# Altium PCB TEMPLATE_PCB_2L.PcbDoc (part 1 of 2)
Units mm, origin at the board's own origin, x right, y up, seen from the top; angles counter-clockwise.
Board outline 123.57 x 47.3 mm, 2 copper layers (Top, Bottom), stack 1.54 mm thick; 72 components, 49 nets, 284 pads, 147 vias.
Unrouted connection lines stored in the file: 24.
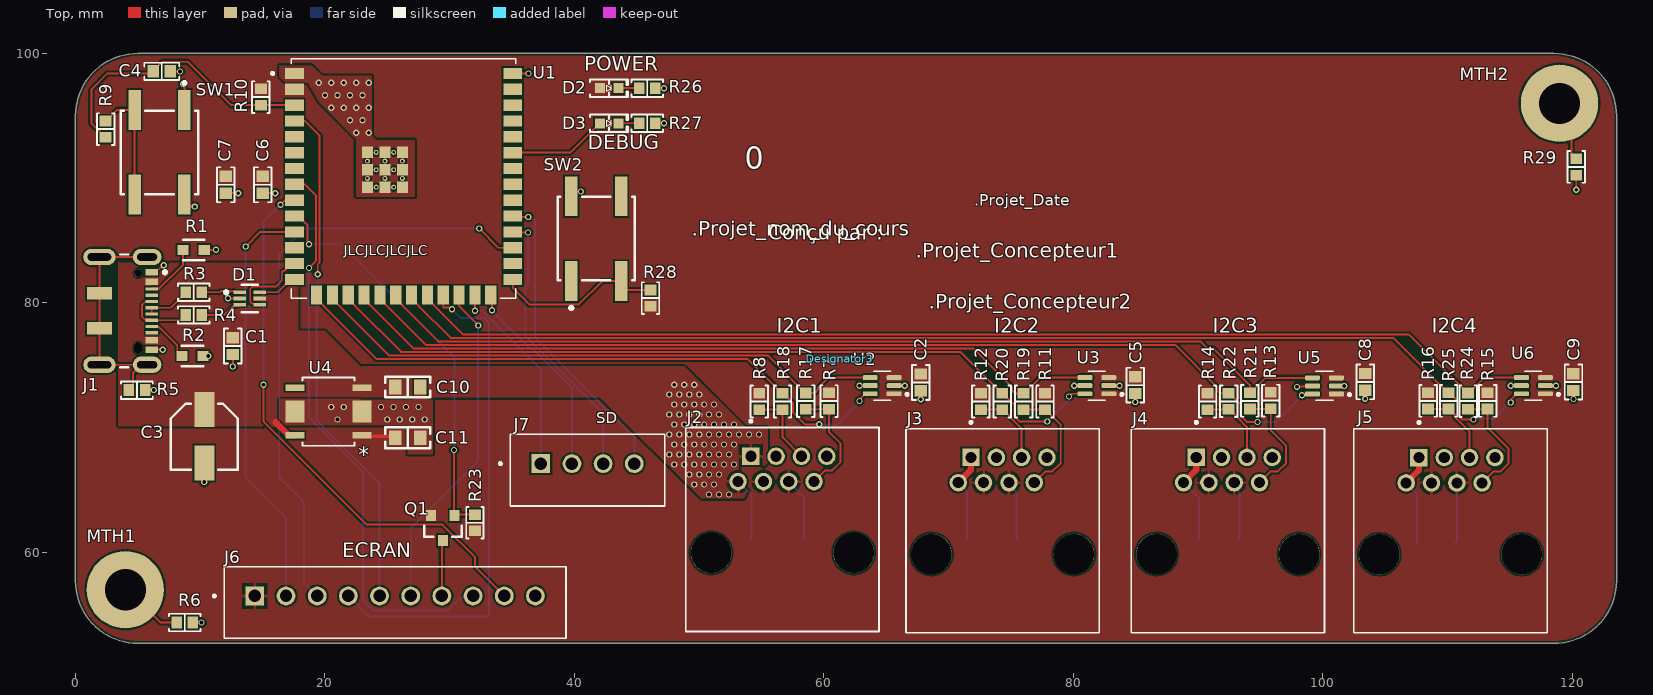
[diagram p0: Top view]
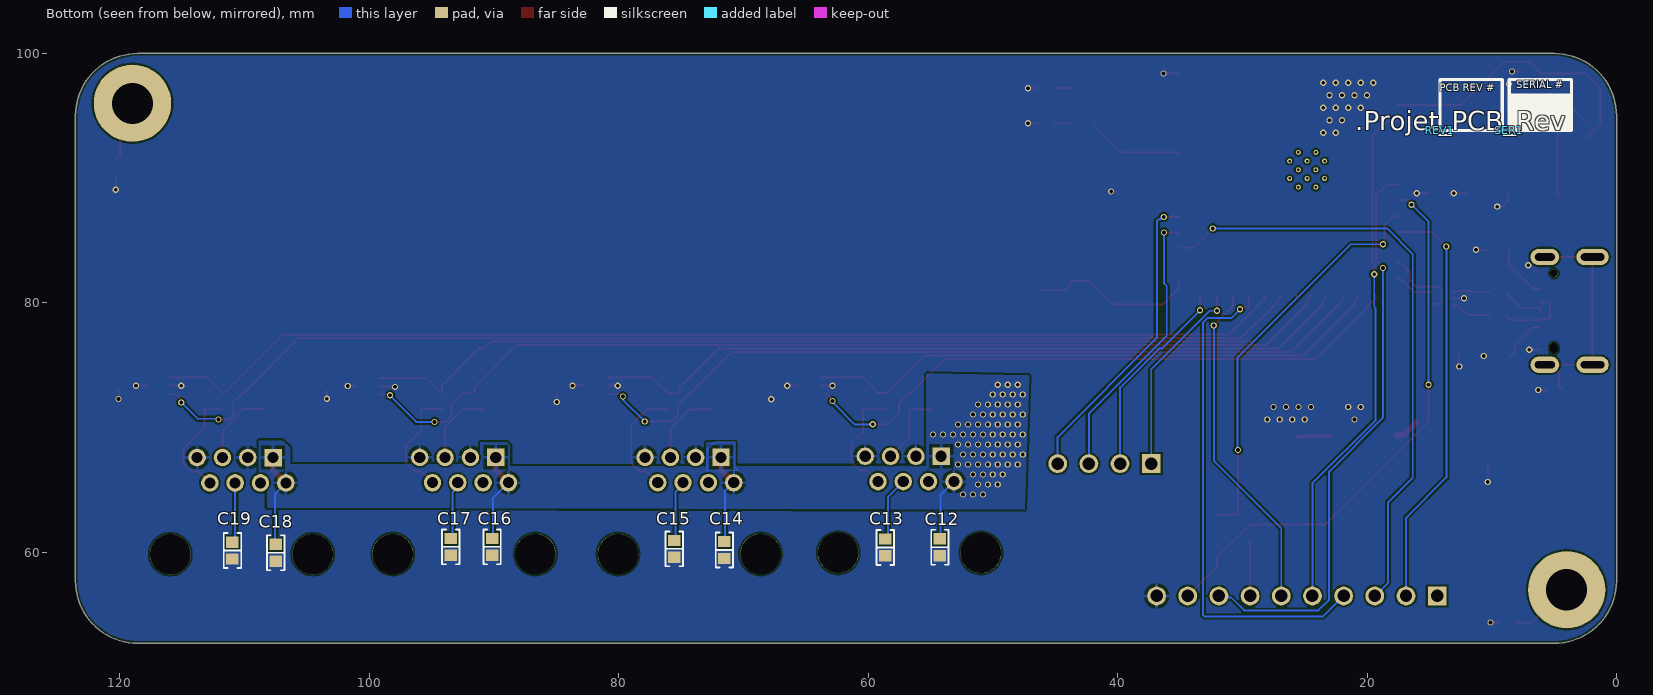
[diagram p1: Bottom view, seen from below]
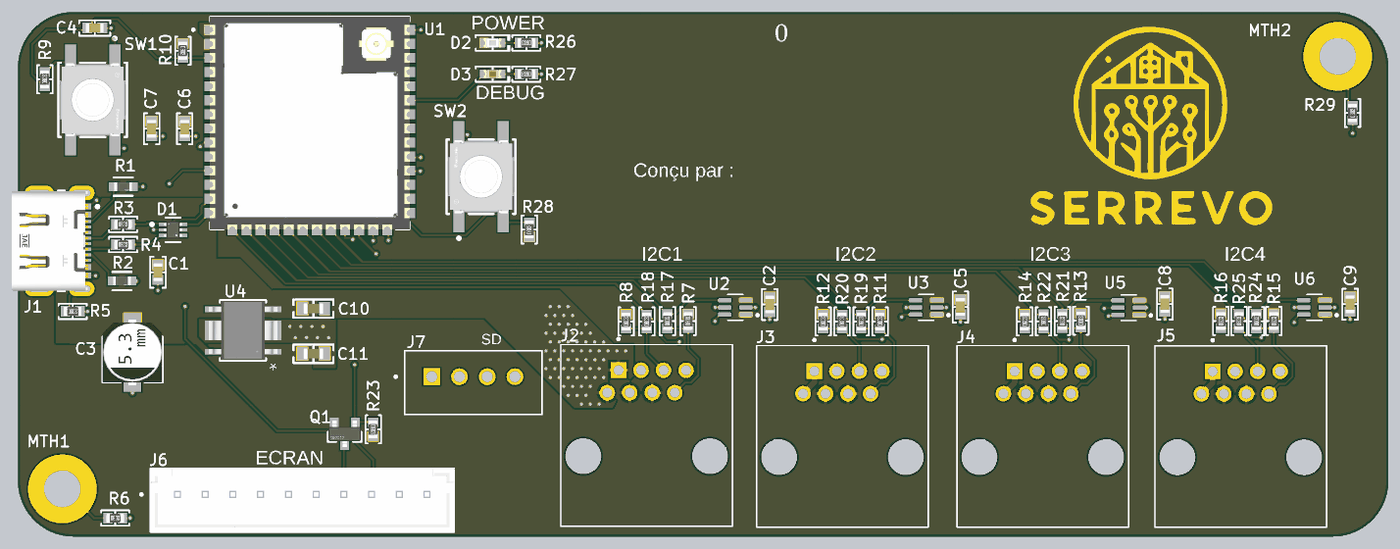
[diagram p2: 3D render of the assembled board from above, using the file's embedded part models]
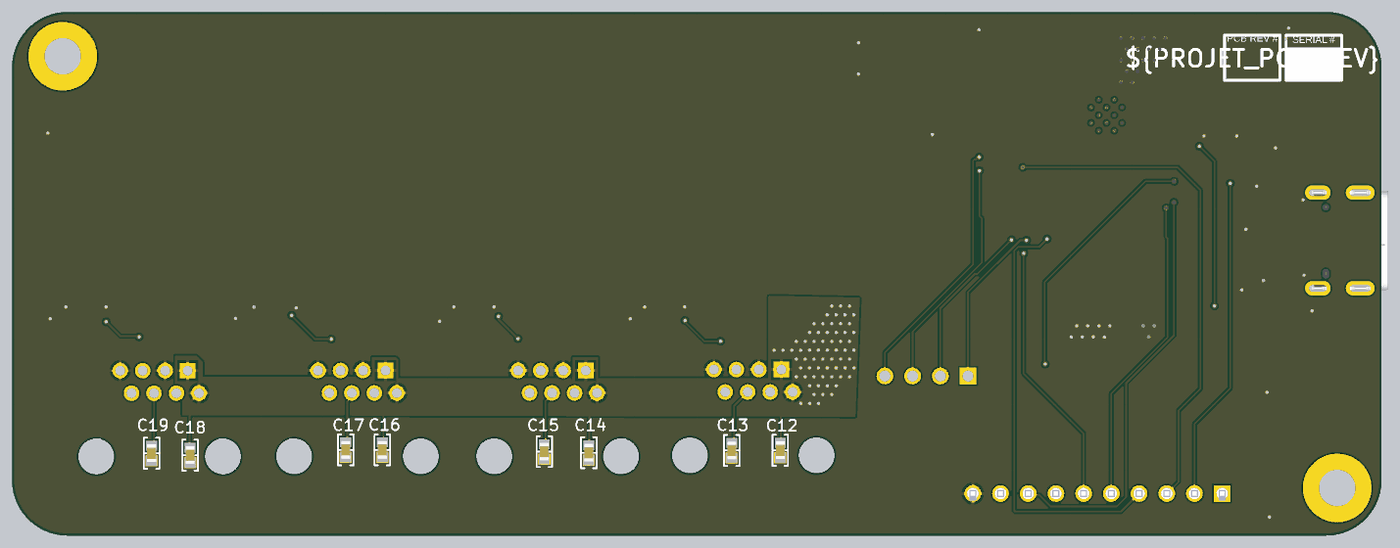
[diagram p3: 3D render of the assembled board from below, using the file's embedded part models]

## Layer stack, top to bottom
Top Solder: solder mask 0.0102, Solder Resist, Dk 3.5
Top: signal copper 0.035
Dielectric 1: core 1.47, FR-4, Dk 4.6
Bottom: signal copper 0.035
Bottom Solder: solder mask 0.0102, Solder Resist, Dk 3.5

## Board outline
0,57.705 0,95 cw(c5,95) 5,100 118.571,100 cw(c118.571,95) 123.571,95 123.571,57.705 cw(c118.571,57.705) 118.571,52.705 5,52.705 cw(c5,57.705)

## Design rules (kind name [scope] priority, off if disabled: settings)
BoardOutlineClearance [All] p1: gap=0.2 ignorepadtopadclearanceinfootprint=FALSE except(0: Arc-SplitContinuation Track-SplitContinuation SMDPad-SplitContinuation THPad-SplitContinuation Via-SplitContinuation Fill-SplitContinuation Poly-SplitContinuation Region-SplitContinuation Text-SplitContinuation)
Clearance [All] p1: gap=0.152 ignorepadtopadclearanceinfootprint=FALSE except(0: Arc-Hole Track-Hole SMDPad-Hole THPad-Hole Via-Hole Fill-Hole Poly-Hole Region-Hole Text-Hole; 0.127: Arc-Arc Arc-Track Track-Track SMDPad-Fill SMDPad-Poly SMDPad-Region; 0.2: Arc-SMDPad Track-SMDPad; 0.254: Arc-Via Track-Via Via-Via; 0.33: Arc-THPad Track-THPad; 0.5: THPad-THPad)
ComponentClearance "Schematic Component Clearance Constraint_1" [InComponent('SER1')] p1: gap=0 collisioncheckmode=3 verticalgap=0 showdistances=FALSE
ComponentClearance "Schematic Component Clearance Constraint" [InComponent('REV1')] p2: gap=0 collisioncheckmode=3 verticalgap=0 showdistances=FALSE
ComponentClearance [All] p3: gap=0.102 collisioncheckmode=3 verticalgap=0.102 showdistances=FALSE
HoleSize [All] p1: absolutevalues=TRUE maxlimit=6.3 minlimit=0.3 maxpercent=80.000 minpercent=20.000
HoleToHoleClearance [All] p1: gap=0.5 allowstackedmicrovias=FALSE
MinimumAnnularRing [All] p1: minimumring=0.1
MinimumSolderMaskSliver [All] p1: minsoldermaskwidth=0.1
PlaneClearance [All] p1: clearance=0.152
PlaneConnect [All] p1: pad.planeconnectstyle=Relief pad.reliefexpansion=0.508 pad.reliefentries=4 pad.reliefconductorwidth=0.254 pad.reliefairgap=0.254 via.planeconnectstyle=Direct via.reliefexpansion=0.508 via.reliefentries=4 via.reliefconductorwidth=0.254 via.reliefairgap=0.254
PolygonConnect [All] p1: thpad.connectstyle=Relief thpad.reliefconductorwidth=0.254 thpad.reliefentries=4 thpad.polygonreliefangle="90 Angle" thpad.airgapwidth=0.254 smdpad.connectstyle=Direct smdpad.reliefconductorwidth=0.254 smdpad.reliefentries=4 smdpad.polygonreliefangle="90 Angle" smdpad.airgapwidth=0.254 via.connectstyle=Direct via.reliefconductorwidth=0.254 via.reliefentries=4 via.polygonreliefangle="90 Angle" via.airgapwidth=0.254
RoutingVias [All] p1: holewidth=0.3 width=0.5 viastyle="Through Hole" minholewidth=0.3 minwidth=0.5 maxholewidth=6.3 maxwidth=6.5
SilkToSilkClearance [All] p1: silktosilkclearance=0.102
SilkToSolderMaskClearance [IsPad] p1: minsilkscreentomaskgap=0.024 clearancetoexposedcopper=FALSE
SolderMaskExpansion SolderMaskExpansion_Via [isVia] p1: expansion=0.102 istentingtop=TRUE
SolderMaskExpansion [All] p2: expansion=0.051 istentingtop=FALSE
Width [All] p1: maxlimit=25.4 minlimit=0.127 preferedwidth=0.152 minimp=50.000000 maximp=50.000000 favimp=50.000000
22 further rules are at their usual default settings.

## Classes and differential pairs
component class TEMPLATE_Connectors: C1 C3 D1 J1 MTH1 MTH2 R1 R2 R3 R4 R5 R6 R29
component class TEMPLATE_Circuit: C2 C4 C5 C6 C7 C9 C10 C11 D2 D3 J2 J3 J4 J5 J6 J7 Q1 R7 R8 R9 R10 R11 R12 R13 R14 R15 R16 R17 R18 R19 R20 R21 R22 R23 R24 R25 R26 SW1 SW2 U1 U2 U3 U4 U5 U6
component class TEMPLATE_Title: REV1 SER1

## Components (designator, comment, footprint, x,y, rotation, side; value= is the part's Value field where it differs from the comment)
C1 "0.1 µF" "CAP 0603_1608" 12.619,76.531 r90 top
C2 "0.012 µF" "CAP 0603_1608" 67.787,73.627 r90 top
C3 "100 µF" "CAP ALSMD 5.3MM H5.4MM" 10.331,69.312 r270 top
C4 "1 µF" "CAP 0603_1608" 6.921,98.558 r0 top
C5 "0.012 µF" "CAP 0603_1608" 84.984,73.4 r90 top
C6 "22µF" "CAP 0603_1608" 15.029,89.474 r90 top
C7 "0.1 µF" "CAP 0603_1608" 12.055,89.474 r90 top
C8 "0.012 µF" "CAP 0603_1608" 103.411,73.67 r90 top
C9 "0.012 µF" "CAP 0603_1608" 120.116,73.649 r90 top
C10 "4.7 µF" "MURATA GRM188 0603_1608" 26.644,69.185 r0 top
C11 "4.7 µF" "MURATA GRM188 0603_1608" 26.644,73.259 r180 top
C12 "47µF" "CAP 0603_1608" 54.254,60.405 r90 bottom
C13 "47µF" "CAP 0603_1608" 58.63,60.395 r90 bottom
C14 "47µF" "CAP 0603_1608" 71.532,60.184 r90 bottom
C15 "47µF" "CAP 0603_1608" 75.552,60.282 r90 bottom
C16 "47µF" "CAP 0603_1608" 90.166,60.44 r90 bottom
C17 "47µF" "CAP 0603_1608" 93.466,60.44 r90 bottom
C18 "47µF" "CAP 0603_1608" 107.508,59.965 r90 bottom
C19 "47µF" "CAP 0603_1608" 110.98,60.139 r90 bottom
D1 "USBLC6-2P6" FP-SOT-666-MFG 13.983,80.355 r0 top
D2 "Green" "LED 0603_1608 GREEN" 42.793,97.215 r0 top
D3 "Red" "LED 0603_1608 RED" 42.793,94.402 r0 top
Designator3 "Comment" STN_STENCIL_TOP_PASTE_181x280 61.271,75.512 r90 top
J1 "Usb-C" FP-DX07S016JA1R1500-MFG 2.921,79.359 r270 top
J2 "SS-60000-007" BEL_SS-60000-007 56.689,65.669 r0 top
J3 "SS-60000-007" BEL_SS-60000-007 74.344,65.583 r0 top
J4 "SS-60000-007" BEL_SS-60000-007 92.408,65.583 r0 top
J5 "SS-60000-007" BEL_SS-60000-007 110.259,65.566 r0 top
J6 "B10B-XH-A(LF)(SN)" JST_B10B-XH-A(LF)(SN) 25.632,55.975 r180 top
J7 "B4B-XH-A" JST_B4B-XH-A 41.063,66.589 r180 top
MTH1 "MTH_M3" MTH_M3#1 4.064,57.15 r0 top
MTH2 "MTH_M3" MTH_M3#2 119.613,96.02 r0 top
Q1 "DMP6350S-7" FP-SOT23-MFG 29.457,61.955 r270 top
R1 "5.1kohms" FP-AC0603-MFG 9.481,84.251 r0 top
R2 "5.1kohms" FP-AC0603-MFG 9.383,75.74 r0 top
R3 "30 Ohms" "RES 0603_1608" 9.481,80.847 r0 top
R4 "30 Ohms" "RES 0603_1608" 9.481,79.032 r0 top
R5 "0 Ohms" "RES 0603_1608" 4.931,73.005 r0 top
R6 "0 Ohms" "RES 0603_1608" 8.766,54.368 r0 top
R7 "330 Ohms" "RES 0603_1608" 60.428,72.128 r90 top
R8 "330 Ohms" "RES 0603_1608" 54.835,72.094 r90 top
R9 "330 Ohms" "RES 0603_1608" 2.421,93.934 r90 top
R10 "10 kOhms" "RES 0603_1608" 14.87,96.504 r270 top
R11 "330 Ohms" "RES 0603_1608" 77.739,72.094 r90 top
R12 "330 Ohms" "RES 0603_1608" 72.601,72.094 r90 top
R13 "330 Ohms" "RES 0603_1608" 95.842,72.168 r90 top
R14 "330 Ohms" "RES 0603_1608" 90.777,72.094 r90 top
R15 "330 Ohms" "RES 0603_1608" 113.237,72.14 r90 top
R16 "330 Ohms" "RES 0603_1608" 108.463,72.14 r90 top
R17 "30 Ohms" "RES 0603_1608" 58.564,72.123 r90 top
R18 "30 Ohms" "RES 0603_1608" 56.7,72.094 r90 top
R19 "30 Ohms" "RES 0603_1608" 76.027,72.094 r90 top
R20 "30 Ohms" "RES 0603_1608" 74.314,72.094 r90 top
R21 "30 Ohms" "RES 0603_1608" 94.17,72.14 r90 top
R22 "30 Ohms" "RES 0603_1608" 92.469,72.107 r90 top
R23 "10 kOhms" "RES 0603_1608" 32.033,62.369 r270 top
R24 "30 Ohms" "RES 0603_1608" 111.672,72.123 r90 top
R25 "30 Ohms" "RES 0603_1608" 110.102,72.14 r90 top
R26 "220 Ohms" "RES 0603_1608" 45.847,97.215 r180 top
R27 "470 Ohms" "RES 0603_1608" 45.847,94.402 r180 top
R28 "10 kOhms" "RES 0603_1608" 46.109,80.384 r90 top
R29 "0 Ohms" "RES 0603_1608" 120.344,90.898 r90 top
REV1 "Revision Cartridge Mini" REV_REVISION_CARTRIDGE_MINI 14.17,93.831 r180 bottom
SER1 "Serial Cartridge MICRO" SER_SERIAL_CARTRIDGE_MICRO 8.609,93.831 r180 bottom
SW1 "EVQ-Q2U01W" FP-EVQ-Q2U01W-MFG 6.738,92.074 r270 top
SW2 "EVQ-Q2U01W" FP-EVQ-Q2U01W-MFG 41.756,85.15 r90 top
U1 "ESP32-S3-WROOM-1U-N16R8" XCVR_ESP32-S3-WROOM-1U-N16R8 26.316,89.984 r0 top
U2 "LTC4311ISC6#TRPBF" SOT65P210X100-6N 64.684,73.363 r180 top
U3 "LTC4311ISC6#TRPBF" SOT65P210X100-6N 81.905,73.363 r180 top
U4 "R1172S331B-E2-FE" HSOP-6_FH006-A-P-SD-2.1_ABL 20.289,71.288 r180 top
U5 "LTC4311ISC6#TRPBF" SOT65P210X100-6N 100.153,73.342 r180 top
U6 "LTC4311ISC6#TRPBF" SOT65P210X100-6N 116.907,73.363 r180 top

## Footprints (in the part's own frame and the unit in brackets; to place one, negate y for a bottom-side part, rotate by r counter-clockwise, add the part's x,y. Pads: shape width x height; smd on the part's side, far side on the other; paste and mask are expansions set on the pad)
BEL_SS-60000-007 [mm]
  rect 1.398x1.398 hole 0.89: 1(-2.535,2.03)
  round 1.398 hole 0.89: 2(-3.555,0) 3(-1.525,0) 4(0.505,0) 5(-0.505,2.03) 6(1.525,2.03) 7(3.555,2.03) 8(2.535,0)
  round 3.25 hole 3.25 unplated: ""(-5.715,-5.72) ""(5.715,-5.72)
  silkscreen extent -7.75,-12.02 7.74,4.94
"CAP 0603_1608" [mm] "Chip Capacitor, 2-Leads, Body 1.60x0.80mm, IPC Medium Density"
  rect 0.9x1 smd: 1(-0.675,0) 2(0.675,0)
  silkscreen extent -1.4,-0.7 1.4,0.7, body extent -0.8,-0.41 0.8,0.41, height 0.82
"CAP ALSMD 5.3MM H5.4MM" [mm] "Aluminum Electrolytic Capacitor, Body 5.30x5.30x5.40mm, IPC Low Density"
  rect 2.8x1.6 smd: 1(-2.15,0) 2(2.15,0)
  silkscreen extent -2.6,-2.7 2.7,2.7, body extent -2.95,-2.7 2.95,2.7, height 5.4
FP-AC0603-MFG [mm]
  rect 0.9x0.8 smd paste+0 mask+0: 1(-0.85,0) 2(0.85,0)
  silkscreen extent -0.85,-0.83 0.85,0.82, body extent -1.4,-0.55 1.4,0.55, height 0.25
FP-DX07S016JA1R1500-MFG [mm]
  rrect100% 1.3x2.3 hole 1.6 slot 0.6 at 0 deg paste-1000 mask+0: 1(-4.32,2.825) 2(4.32,2.825)
  rrect100% 1.3x2.6 hole 1.9 slot 0.6 at 0 deg paste-1000 mask+0: 3(-4.32,-1) 6(4.32,-1)
  rect 1x2 smd paste+0 mask+0: 4(-1.4,-1) 5(1.4,-1)
  rect 0.52x1 smd paste+0 mask+0: A1/B12(-3.1,3.2) A4/B9(-2.35,3.2) A12/B1(3.1,3.2) B4/A9(2.35,3.2)
  rect 0.27x1 smd paste+0 mask+0: A5(-1.75,3.2) A6(-0.25,3.2) A7(0.75,3.2) A8(1.75,3.2) B5(1.25,3.2) B6(0.25,3.2) B7(-0.75,3.2) B8(-1.25,3.2)
  round 0.6 hole 0.6 unplated paste-1000 mask+0: ""(-3,2.1)
  rrect100% 0.85x0.6 hole 0.6 slot 0.85 at 0 deg unplated paste-1000 mask+0: ""(3,2.1)
  silkscreen extent -4.52,0.67 4.52,4.38, body extent -5.07,-3.75 5.07,4.08, height 0.25
FP-EVQ-Q2U01W-MFG [mm]
  rect 3.2x1 smd paste+0 mask+0: A(-3.4,2) A'(3.4,2) B(-3.4,-2) B'(3.4,-2)
  silkscreen extent -5.67,-3.1 3.35,3.1, body extent -5.1,-3.2 5.1,3.2, height 0.25
FP-SOT23-MFG [mm]
  rect 0.9x0.8 smd paste+0 mask+0: 1(-1,0.95) 2(-1,-0.95) 3(1,0)
  silkscreen extent -0.18,-1.5 0.7,1.5, body extent -1.55,-1.6 1.55,1.6, height 0.25
FP-SOT-666-MFG [mm]
  rect 0.99x0.3 smd paste+0 mask+0: 1(-0.805,0.5) 2(-0.805,0) 3(-0.805,-0.5) 4(0.805,-0.5) 5(0.805,0) 6(0.805,0.5)
  silkscreen extent -2.02,-1.1 0.65,1.1, body extent -1.4,-0.95 1.4,0.95, height 0.25
HSOP-6_FH006-A-P-SD-2.1_ABL [mil]
  rect 60x20 smd paste+0 mask+0: 1(-106,75.2) 3(-106,-75.2) 4(106,-75.2) 6(106,75.2)
  rect 60x70 smd paste+0 mask+0: 2(-106,0) 5(106,0)
  silkscreen extent -82,-108 82,108, body extent -122,-103 122,103, height 69
JST_B4B-XH-A [mm]
  rect 1.508x1.508 / inner round 1.508 / far side rect 1.508x1.508 hole 1: 1(3.75,-0.525)
  round 1.508 hole 1: 2(1.25,-0.525) 3(-1.25,-0.525) 4(-3.75,-0.525)
  silkscreen extent -6.2,-2.88 7.1,2.87
JST_B10B-XH-A(LF)(SN) [mm]
  rect 1.508x1.508 / inner round 1.508 / far side rect 1.508x1.508 hole 1: 1(11.25,-0.525)
  round 1.508 hole 1: 2(8.75,-0.525) 3(6.25,-0.525) 4(3.75,-0.525) 5(1.25,-0.525) 6(-1.25,-0.525) 7(-3.75,-0.525) 8(-6.25,-0.525) 9(-8.75,-0.525) 10(-11.25,-0.525)
  silkscreen extent -13.7,-2.87 14.6,2.88, body extent -13.7,-2.88 13.7,2.88, height 7
"LED 0603_1608 GREEN" [mm] "Chip Diode, 2-Leads, Body 1.60x0.80mm, IPC Medium Density"
  rect 0.8x0.8 smd: 1(-0.75,0) 2(0.75,0)
  silkscreen extent -1.52,-0.7 1.52,0.7, body extent -0.8,-0.4 0.8,0.4, height 0.53
"LED 0603_1608 RED" [mm] "Chip Diode, 2-Leads, Body 1.60x0.80mm, IPC Medium Density"
  rect 0.8x0.8 smd: 1(-0.75,0) 2(0.75,0)
  silkscreen extent -1.52,-0.7 1.52,0.7, body extent -0.8,-0.4 0.8,0.4, height 0.53
MTH_M3#1 [mm] "Mounting Hole Metric M3"
  round 6.2 hole 3.3 paste-7.62 mask+0.07: 1(-0.064,-0.15)
MTH_M3#2 [mm] "Mounting Hole Metric M3"
  round 6.2 hole 3.3 paste-7.62 mask+0.07: 1(-0.613,-0.02)
"MURATA GRM188 0603_1608" [mm] "Chip Capacitor, 2-Leads, Body 1.60x0.80mm"
  rect 1x1.2 smd: 1(-1,0) 2(1,0)
  silkscreen extent -1.8,-0.82 1.8,0.82, body extent -0.9,-0.5 0.9,0.5, height 1
"RES 0603_1608" [mm] "Chip Resistor, 2-Leads, Body 1.60x0.80mm, IPC Medium Density"
  rect 0.85x0.95 smd: 1(-0.65,0) 2(0.65,0)
  silkscreen extent -1.27,-0.7 1.27,0.7, body extent -0.8,-0.4 0.8,0.4, height 0.45
REV_REVISION_CARTRIDGE_MINI [mm]
  silkscreen extent 0,0 5,4.08
SER_SERIAL_CARTRIDGE_MICRO [mm]
  silkscreen extent 0,0 5.02,4.08
SOT65P210X100-6N [mm]
  rrect50% 1.19x0.4 smd: 1(-0.96,0.65) 2(-0.96,0) 3(-0.96,-0.65) 4(0.96,-0.65) 5(0.96,0) 6(0.96,0.65)
  silkscreen extent -2.1,-1.16 0.68,1.16
STN_STENCIL_TOP_PASTE_181x280 [mm]
  body extent -90.5,-140 -88.5,-138
XCVR_ESP32-S3-WROOM-1U-N16R8 [mm]
  rect 1.5x0.9 smd: 1(-8.75,8.41) 2(-8.75,7.14) 3(-8.75,5.87) 4(-8.75,4.6) 5(-8.75,3.33) 6(-8.75,2.06) 7(-8.75,0.79) 8(-8.75,-0.48) 9(-8.75,-1.75) 10(-8.75,-3.02) 11(-8.75,-4.29) 12(-8.75,-5.56) 13(-8.75,-6.83) 14(-8.75,-8.1) 27(8.75,-8.1) 28(8.75,-6.83) 29(8.75,-5.56) 30(8.75,-4.29) 31(8.75,-3.02) 32(8.75,-1.75) 33(8.75,-0.48) 34(8.75,0.79) 35(8.75,2.06) 36(8.75,3.33) 37(8.75,4.6) 38(8.75,5.87) 39(8.75,7.14) 40(8.75,8.41)
  rect 0.9x1.5 smd: 15(-6.985,-9.35) 16(-5.715,-9.35) 17(-4.445,-9.35) 18(-3.175,-9.35) 19(-1.905,-9.35) 20(-0.635,-9.35) 21(0.635,-9.35) 22(1.905,-9.35) 23(3.175,-9.35) 24(4.445,-9.35) 25(5.715,-9.35) 26(6.985,-9.35)
  rect 0.9x0.9 smd: 41_1(-2.9,2.09) 41_2(-1.5,2.09) 41_3(-0.1,2.09) 41_4(-2.9,0.69) 41_5(-1.5,0.69) 41_6(-0.1,0.69) 41_7(-2.9,-0.71) 41_8(-1.5,-0.71) 41_9(-0.1,-0.71)
  round 0.4 hole 0.2 mask+0: 41_10(-2.2,2.09) 41_11(-0.8,2.09) 41_12(-2.9,1.39) 41_13(-1.5,1.39) 41_14(-0.1,1.39) 41_15(-2.2,0.69) 41_16(-0.8,0.69) 41_17(-2.9,-0.01) 41_18(-1.5,-0.01) 41_19(-0.1,-0.01) 41_20(-2.2,-0.71) 41_21(-0.8,-0.71)
  silkscreen extent -10.6,-9.6 9,9.6, body extent -9,-9.6 9,9.6, height 3.35

## Part data
C1: library part KGM15AR71C104MM, "CAP CER 0.1UF 16V X7R 0603", Device Package="0603 (1608 Metric)", Manufacturer="KYOCERA AVX", Operating Temperature="-55°C ~ 125°C", Package / Case=0603, Supplier Part Number 1=478-KGM15AR71C104MMCT-ND, Temperature Coefficient=X7R, Tolerance=±20%, Voltage - Rated=16V, Applications="General Purpose", Capacitance="0.1 µF", ComponentLink1Description=Datasheet, ComponentLink1URL=https://datasheets.kyocera-avx.com/X7RDielectric.pdf, ComponentLink2Description="DigiKey Link", ComponentLink2URL=https://www.digikey.com/en/products/detail/kyocera-avx/KGM15AR71C104MM/3661140, lastupdated="2024-02-09 20:09:12", Lifecycle Status=Active, Minimum Order=1, Mounting Type="Surface Mount, MLCC", Packaging=CutTape, Part Number=KGM15AR71C104MM, Part Status=Active, partid=52535, Price=0.01, Series="KGM - X7R", Size / Dimension="0.063\" L x 0.032\" W (1.60mm x 0.81mm)", Supplier 1=DigiKey, Thickness (Max)="0.035\" (0.90mm)"
C2 C5 C8 C9: library part CC0603KRX7R7BB123, "CAP CER 0.012UF 16V X7R 0603", Device Package="0603 (1608 Metric)", Manufacturer=Yageo, Operating Temperature="-55°C ~ 125°C", Supplier Part Number 1=311-3370-1-ND, Temperature Coefficient=X7R, Tolerance=±10%, Voltage - Rated=16V, Applications="General Purpose", Capacitance="0.012 µF", ComponentLink1Description=Datasheet, ComponentLink1URL=https://www.yageo.com/upload/media/product/productsearch/datasheet/mlcc/UPY-GPHC_X7R_6.3V-to-50V_18.pdf, ComponentLink2Description="DigiKey Link", ComponentLink2URL=https://www.digikey.com/en/products/detail/yageo/CC0603KRX7R7BB123/5883754, lastupdated="2024-02-09 20:10:17", Lifecycle Status=Active, Minimum Order=1, Mounting Type="Surface Mount, MLCC", Package / Case="0603 (1608 Metric)", Packaging=TapeAndReel, Part Number=CC0603KRX7R7BB123, Part Status=Active, partid=12340, Price=0.01, Series=CC, Size / Dimension="0.063\" L x 0.031\" W (1.60mm x 0.80mm)", Supplier 1=DigiKey, Thickness (Max)="0.035\" (0.90mm)"
C3: library part EEE-1AA101WR, "CAP ALUM 100UF 20% 10V SMD", Device Package="Radial, Can - SMD", Lifetime @ Temp.="1000 Hrs @ 85°C", Manufacturer="Panasonic Electronic Components", Operating Temperature="-40°C ~ 85°C", Ratings=AEC-Q200, Ripple Current @ High Frequency="85 mA @ 10 kHz", Ripple Current @ Low Frequency="50 mA @ 120 Hz", Supplier Part Number 1=PCE3867CT-ND, Tolerance=±20%, Voltage - Rated="10 V", Applications=Automotive, Capacitance="100 µF", ComponentLink1Description=Datasheet, ComponentLink1URL=//media.digikey.com/pdf/Data%20Sheets/Panasonic%20Electronic%20Components/S_Series,Type_V_Rev2018.pdf, ComponentLink2Description="DigiKey Link", ComponentLink2URL=https://www.digikey.com/en/products/detail/panasonic-electronic-components/EEE-1AA101WR/766034, Height - Seated (Max)="0.213\" (5.40mm)", lastupdated="2024-06-03 19:53:13", Lifecycle Status=Active, Minimum Order=1, Mounting Type="Surface Mount", Package / Case="Radial, Can - SMD", Packaging=TapeAndReel, Part Number=EEE-1AA101WR, Part Status=Active, partid=7834, Polarization=Polar, Price=0.11, Series=S, Size / Dimension="0.197\" Dia (5.00mm)", Supplier 1=DigiKey, Surface Mount Land Size="0.209\" L x 0.209\" W (5.30mm x 5.30mm)"
C4: library part C0603X105M4RACAUTO, "CAP CER 1UF 16V X7R 0603", Device Package="0603 (1608 Metric)", Manufacturer=KEMET, Operating Temperature="-55°C ~ 125°C", Ratings=AEC-Q200, Supplier Part Number 1=399-17719-1-ND, Temperature Coefficient=X7R, Tolerance=±20%, Voltage - Rated=16V, Applications="Automotive, Boardflex Sensitive", Capacitance="1 µF", ComponentLink1Description=Datasheet, ComponentLink1URL=https://api.kemet.com/component-edge/download/datasheet/C0603X105M4RACAUTO.pdf, ComponentLink2Description="DigiKey Link", ComponentLink2URL=https://www.digikey.com/en/products/detail/kemet/C0603X105M4RACAUTO/8635846, Features="Soft Termination", lastupdated="2024-02-09 20:10:28", Lifecycle Status=Active, Minimum Order=1, Mounting Type="Surface Mount, MLCC", Package / Case="0603 (1608 Metric)", Packaging=TapeAndReel, Part Number=C0603X105M4RACAUTO, Part Status=Active, partid=3927, Price=0.06, Series="SMD Auto X7R Flex", Size / Dimension="0.063\" L x 0.031\" W (1.60mm x 0.80mm)", Supplier 1=DigiKey, Thickness (Max)="0.037\" (0.95mm)"
C6: library part 06036D226MAT2A, "CAP CER 22UF 6.3V X5R 0603", Device Package="0603 (1608 Metric)", Manufacturer="AVX Corporation", Operating Temperature="-55°C ~ 85°C", Supplier Part Number 1=478-10812-1-ND, Temperature Coefficient=X5R, Tolerance=±20%, Voltage - Rated=6.3V, Applications="General Purpose", Capacitance=22µF, ComponentLink1Description=Datasheet, ComponentLink1URL=http://datasheets.avx.com/cx5r.pdf, ComponentLink2Description="DigiKey Link", ComponentLink2URL=http://digikey.com/product-detail/en/avx-corporation/06036D226MAT2A/478-10812-1-ND/7536349, lastupdated="2020-09-02 01:03:16", Lifecycle Status=Active, Minimum Order=1, Mounting Type="Surface Mount, MLCC", Package / Case="0603 (1608 Metric)", Packaging=TapeAndReel, Part Number=06036D226MAT2A, Part Status=Active, partid=13180, Price=0.10, Series=-, Size / Dimension="0.063\" L x 0.032\" W (1.60mm x 0.81mm)", Supplier 1=DigiKey, Thickness (Max)="0.040\" (1.02mm)"
C7: library part C0603C104M4RAC7411, "CAP CER 0.1UF 16V X7R 0603", Device Package="0603 (1608 Metric)", Manufacturer=KEMET, Operating Temperature="-55°C ~ 125°C", Supplier Part Number 1=399-5784-2-ND, Temperature Coefficient=X7R, Tolerance=±20%, Voltage - Rated=16V, Applications="Bypass, Decoupling", Capacitance="0.1 µF", ComponentLink1Description=Datasheet, ComponentLink1URL=https://api.kemet.com/component-edge/download/datasheet/C0603C104M4RAC7411.pdf, ComponentLink2Description="DigiKey Link", ComponentLink2URL=https://www.digikey.com/en/products/detail/kemet/C0603C104M4RAC7411/1865802, lastupdated="2024-02-09 20:10:25", Lifecycle Status=Active, Minimum Order=15000, Mounting Type="Surface Mount, MLCC", Package / Case="0603 (1608 Metric)", Packaging=TapeAndReel, Part Number=C0603C104M4RAC7411, Part Status=Active, partid=6660, Price=0.01, Series="SMD Comm X7R", Size / Dimension="0.063\" L x 0.031\" W (1.60mm x 0.80mm)", Supplier 1=DigiKey, Thickness (Max)="0.034\" (0.87mm)"
C10 C11: library part GRM188C81C475KE11D, "CAP CER 4.7UF 16V X6S 0603", Device Package="0603 (1608 Metric)", Manufacturer="Murata Electronics", Operating Temperature="-55°C ~ 105°C", Supplier Part Number 1=490-13362-1-ND, Temperature Coefficient=X6S, Tolerance=±10%, Voltage - Rated=16V, Applications="General Purpose", Capacitance="4.7 µF", ComponentLink1Description=Datasheet, ComponentLink1URL=https://search.murata.co.jp/Ceramy/image/img/A01X/G101/ENG/GRM188C81C475KE11-01.pdf, ComponentLink2Description="DigiKey Link", ComponentLink2URL=https://www.digikey.com/en/products/detail/murata-electronics/GRM188C81C475KE11D/4905320, lastupdated="2024-07-20 00:23:22", Lifecycle Status=Active, Minimum Order=1, Mounting Type="Surface Mount, MLCC", Package / Case="0603 (1608 Metric)", Packaging=TapeAndReel, Part Number=GRM188C81C475KE11D, Part Status=Active, partid=2389, Price=0.03, Series=GRM, Size / Dimension="0.063\" L x 0.031\" W (1.60mm x 0.80mm)", Supplier 1=DigiKey, Thickness (Max)="0.037\" (0.95mm)"
C12 C13 C14 C15 C16 C17 C18 C19: library part 06036D476MAT2A, "CAP CER 47UF 6.3V X5R 0603", Device Package="0603 (1608 Metric)", Manufacturer="AVX Corporation", Operating Temperature="-55°C ~ 85°C", Supplier Part Number 1=478-11180-1-ND, Temperature Coefficient=X5R, Tolerance=±20%, Voltage - Rated=6.3V, Applications="General Purpose", Capacitance=47µF, ComponentLink1Description=Datasheet, ComponentLink1URL=http://datasheets.avx.com/cx5r.pdf, ComponentLink2Description="DigiKey Link", ComponentLink2URL=http://digikey.com/product-detail/en/avx-corporation/06036D476MAT2A/478-11180-1-ND/7563130, lastupdated="2020-09-02 01:03:20", Lifecycle Status=Active, Minimum Order=1, Mounting Type="Surface Mount, MLCC", Package / Case="0603 (1608 Metric)", Packaging=TapeAndReel, Part Number=06036D476MAT2A, Part Status=Active, partid=11014, Price=0.41, Series=-, Size / Dimension="0.063\" L x 0.031\" W (1.60mm x 0.80mm)", Supplier 1=DigiKey
D1: library part CMP-12225-000058-1, "TVS DIODE 5.25V 17V SOT666", Breakdown Voltage=6V, Capacitance=3.5pF, Case/Package=SOT-666, Clamping Voltage=17V, Leakage Current=150nA, Max Operating Temperature=125°C, Min Operating Temperature=-40°C, Operating Supply Voltage=5V, Package Quantity=1, Peak Pulse Current=5A, Power Line Protection=Yes, Test Current=1mA, Contact Plating=Tin, Depth=1.3mm, Direction=Unidirectional, Element Configuration=Dual, ESD Protection=Yes, Height=0.6mm, Lead Free="Lead Free", Length=1.7mm, Max Breakdown Voltage=6V, Max Reverse Leakage Current=150nA, Min Breakdown Voltage=6V, Mount="Surface Mount", Number of Bidirectional Channels=2, Number of Channels=2, Number of Elements=1, Number of Pins=6, Packaging="Tape and Reel", Polarity=Unidirectional, Radiation Hardening=No, REACH SVHC="No SVHC", Reverse Breakdown Voltage=6V, Reverse Standoff Voltage=5V, Termination=SMD/SMT, Width=1.3mm, Working Voltage=5V
D2: library part SML-D12P8WT86, "LED GREEN DIFFUSED 0603 SMD", Current - Test=20mA, Device Package="0603 (1608 Metric)", Lens Color=White, Manufacturer="Rohm Semiconductor", Millicandela Rating=6.3mcd, Supplier Device Package="1608 (0603)", Supplier Part Number 1=511-1579-1-ND, Voltage - Forward (Vf) (Typ)=2.2V, Color=Green, ComponentLink1Description=Datasheet, ComponentLink1URL=https://www.rohm.com/datasheet/SML-D12V8W, ComponentLink2Description="DigiKey Link", ComponentLink2URL=https://www.digikey.com/en/products/detail/rohm-semiconductor/SML-D12P8WT86/1641798, Configuration=Standard, Height (Max)=0.65mm, lastupdated="9/26/2023 8:24:57 PM", Lens Size="1.20mm x 0.80mm", Lens Style="Rectangle with Flat Top", Lens Transparency=Diffused, Lifecycle Status=Active, Minimum Order=1, Mounting Type="Surface Mount", Package / Case="0603 (1608 Metric)", Packaging=TapeAndReel, Part Number=SML-D12P8WT86, Part Status=Active, partid=616, Price=0.03, Series=EXCELED™, Size / Dimension="1.60mm L x 0.80mm W", Supplier 1=DigiKey, Wavelength - Dominant=560nm
D3: library part SML-D12U1WT86, "LED RED DIFFUSED 1608 SMD", Current - Test=20mA, Device Package="0603 (1608 Metric)", Lens Color=White, Manufacturer="Rohm Semiconductor", Millicandela Rating=63mcd, Supplier Device Package="1608 (0603)", Supplier Part Number 1=SML-D12U1WT86CT-ND, Voltage - Forward (Vf) (Typ)=2.2V, Color=Red, ComponentLink1Description=Datasheet, ComponentLink1URL=https://www.rohm.com/datasheet/SML-D12U1W, ComponentLink2Description="DigiKey Link", ComponentLink2URL=https://www.digikey.com/en/products/detail/rohm-semiconductor/SML-D12U1WT86/5843853, Configuration=Standard, Height (Max)=0.65mm, lastupdated="9/26/2023 8:25:49 PM", Lens Size="1.20mm x 0.80mm", Lens Style="Rectangle with Flat Top", Lens Transparency=Diffused, Lifecycle Status=Active, Minimum Order=1, Mounting Type="Surface Mount", Package / Case="0603 (1608 Metric)", Packaging=TapeAndReel, Part Number=SML-D12U1WT86, Part Status=Active, partid=452, Price=0.02, Series=SML-D12, Size / Dimension="1.60mm L x 0.80mm W", Supplier 1=DigiKey, Wavelength - Dominant=620nm
J1: library part CMP-19038-000003-1, "CONN RCP USB2.0 TYP C 24P SMD RA"
J2 J3 J4 J5: "Jack Modular Connector 8p8c _RJ45, Ethernet_ Vertical Unshielded Cat6", Package=None, Digi-Key_Part_Number=380-1094-5-ND, Digi-Key_Purchase_URL=https://www.digikey.ca/product-detail/en/stewart-connector/SS-60000-007/380-1094-5-ND/1033361?utm_source=snapeda&utm_medium=aggregator&utm_campaign=symbol, MF="Stewart Connector", MP=SS-60000-007, SnapEDA_Link=https://www.snapeda.com/parts/SS-60000-007/Stewart%20Connector/view-part/2842197/?ref=snap
J6: "Connector Header Through Hole 10 position 0.098 (2.50mm)", Package=None, Check_prices=https://www.snapeda.com/parts/B10B-XH-A(LF)(SN)/JST+Sales+America+Inc./view-part/?ref=eda, MF="JST Sales", MP=B10B-XH-A(LF)(SN), SnapEDA_Link=https://www.snapeda.com/parts/B10B-XH-A(LF)(SN)/JST+Sales+America+Inc./view-part/?ref=snap
J7: Package=None, Availability=Unavailable, MF="{'manufacturer': u'JST Sales America Inc.'}", MP=B4B-XH-A, Price=None
MTH1 MTH2: library part CMP-006-000008-1, "MTH - MOUNTING HOLE M3 PLATED - M3", Package=M3, Assembly Type=NONE, Component Type="Standard (No BOM)", Design Item ID=MTH_M3, HelpURL=https://littlemachineshop.com/images/gallery/PDF/TapDrillSizes.pdf, Pin Count=1, Source=CEGEP_SHERBROOKE_TGE_LIBRARY.SchLib
Q1: library part CMP-12801-000018-2, "MOSFET P-CHA 60V 720MW SOT23", Case/Package=TO-236-3, Continuous Drain Current (ID)=1.5A, Drain to Source Voltage (Vdss)=60V, Input Capacitance=206pF, Max Operating Temperature=150°C, Max Power Dissipation=720mW, Min Operating Temperature=-55°C, Mount="Surface Mount", Packaging="Tape and Reel", Rds On Max=350mR, RoHS Compliant=Yes
R1 R2: library part CMP-03412-025080-2, "RES 5.1KΩ 1.00% 0.1W 0603", Case Code (Imperial)=0603, Case Code (Metric)=1608, Max Operating Temperature=155°C, Max Power Dissipation=100mW, Min Operating Temperature=-55°C, Ratings=AEC-Q200, Resistance=5.1kR, Resistor Type="Thick Film", Temperature Coefficient=100ppm/°C, Tolerance=1%, Voltage rating=50V, Case/Package=0603, Features="Moisture Resistant", Height=0.45mm, Length=1.6mm, Number of Terminations=2, Packaging="Tape and Reel", Power Rating=100mW, RoHS Compliant=Yes, Series=AC, Termination=SMD/SMT, Weight=7.1E-05oz, Width=0.8mm
R3 R4 R17 R18 R19 R20 R21 R22 R24 R25: library part ESR03EZPJ300, "RES SMD 30 OHM 5% 1/4W 0603", Device Package="0603 (1608 Metric)", Manufacturer="Rohm Semiconductor", Operating Temperature="-55°C ~ 155°C", Power (Watts)="0.25W, 1/4W", Ratings=AEC-Q200, Supplier Device Package=0603, Supplier Part Number 1=RHM30DCT-ND, Temperature Coefficient=±200ppm/°C, Tolerance=±5%, ComponentLink1Description=Datasheet, ComponentLink1URL=https://www.rohm.com/datasheet/ESR01MZPF/esr-e, ComponentLink2Description="DigiKey Link", ComponentLink2URL=https://www.digikey.com/en/products/detail/rohm-semiconductor/ESR03EZPJ300/4051234, Composition="Thick Film", Features="Automotive AEC-Q200, Pulse Withstanding", Height - Seated (Max)="0.022\" (0.55mm)", lastupdated="2024-02-09 20:42:51", Lifecycle Status=Active, Minimum Order=1, Number of Terminations=2, Package / Case="0603 (1608 Metric)", Packaging=TapeAndReel, Part Number=ESR03EZPJ300, Part Status=Active, partid=16506, Price=0.01, Resistance="30 Ohms", Series=ESR, Size / Dimension="0.063\" L x 0.031\" W (1.60mm x 0.80mm)", Supplier 1=DigiKey
R5 R6 R29: library part CR0603AJ/-000EAS, "RESA-AS 0603 0R JUMPER 100MW", Device Package="0603 (1608 Metric)", Manufacturer="Bourns Inc.", Operating Temperature="-55°C ~ 155°C", Power (Watts)="0.1W, 1/10W", Ratings=AEC-Q200, Supplier Device Package=0603, Supplier Part Number 1=CR0603AJ/-000EASCT-ND, Tolerance=Jumper, ComponentLink1Description=Datasheet, ComponentLink1URL=//media.digikey.com/pdf/Data%20Sheets/Bourns%20PDFs/CRyyyyA-AS_Model_DS.pdf, ComponentLink2Description="DigiKey Link", ComponentLink2URL=https://www.digikey.com/en/products/detail/bourns-inc/CR0603AJ-000EAS/10240122, Composition="Thick Film", Features="Anti-Sulfur, Automotive AEC-Q200, Moisture Resistant", Height - Seated (Max)="0.022\" (0.55mm)", lastupdated="9/18/2023 7:33:24 PM", Lifecycle Status=Active, Minimum Order=1, Number of Terminations=2, Package / Case="0603 (1608 Metric)", Packaging=TapeAndReel, Part Number=CR0603AJ/-000EAS, Part Status=Active, partid=24557, Price=0.01, Resistance="0 Ohms", Series=CR0603A-AS, Size / Dimension="0.063\" L x 0.031\" W (1.60mm x 0.80mm)", Supplier 1=DigiKey
R7 R8 R9 R11 R12 R13 R14 R15 R16: library part CRGH0603F330R, "RES SMD 330 OHM 1% 1/5W 0603", Device Package="0603 (1608 Metric)", Manufacturer="TE Connectivity Passive Product", Operating Temperature="-55°C ~ 155°C", Power (Watts)="0.2W, 1/5W", Supplier Device Package=0603, Supplier Part Number 1=A129541CT-ND, Temperature Coefficient=±100ppm/°C, Tolerance=±1%, ComponentLink1Description=Datasheet, ComponentLink1URL=https://www.te.com/commerce/DocumentDelivery/DDEController?Action=srchrtrv&DocNm=1773204-1&DocType=DS&DocLang=English, ComponentLink2Description="DigiKey Link", ComponentLink2URL=https://www.digikey.com/en/products/detail/te-connectivity-passive-product/CRGH0603F330R/5586961, Composition="Thick Film", Height - Seated (Max)="0.022\" (0.55mm)", lastupdated="2024-02-09 20:43:33", Lifecycle Status=Active, Minimum Order=1, Number of Terminations=2, Package / Case="0603 (1608 Metric)", Packaging=TapeAndReel, Part Number=CRGH0603F330R, Part Status=Active, partid=5733, Price=0.01, Resistance="330 Ohms", Series="CRGH, Neohm", Size / Dimension="0.063\" L x 0.031\" W (1.60mm x 0.80mm)", Supplier 1=DigiKey
R10 R23 R28: library part RCS060310K0JNEA, "RES SMD 10K OHM 5% 1/4W 0603", Device Package="0603 (1608 Metric)", Manufacturer="Vishay Dale", Operating Temperature="-55°C ~ 155°C", Power (Watts)="0.25W, 1/4W", Ratings=AEC-Q200, Supplier Device Package=0603, Supplier Part Number 1=541-2817-1-ND, Temperature Coefficient=±200ppm/°C, Tolerance=±5%, ComponentLink1Description=Datasheet, ComponentLink1URL=http://www.vishay.com/docs/20065/rcse3.pdf, ComponentLink2Description="DigiKey Link", ComponentLink2URL=https://www.digikey.com/en/products/detail/vishay-dale/RCS060310K0JNEA/5866963, Composition="Thick Film", Features="Automotive AEC-Q200, Pulse Withstanding", Height - Seated (Max)="0.020\" (0.50mm)", lastupdated="2024-02-09 20:43:35", Lifecycle Status=Active, Minimum Order=1, Number of Terminations=2, Package / Case="0603 (1608 Metric)", Packaging=TapeAndReel, Part Number=RCS060310K0JNEA, Part Status=Active, partid=5383, Price=0.01, Resistance="10 kOhms", Series="RCS e3", Size / Dimension="0.061\" L x 0.033\" W (1.55mm x 0.85mm)", Supplier 1=DigiKey
R26: library part CR0603-FX-2200ELF, "RES SMD 220 OHM 1% 1/10W 0603", Device Package="0603 (1608 Metric)", Manufacturer="Bourns Inc.", Operating Temperature="-55°C ~ 155°C", Power (Watts)="0.1W, 1/10W", Supplier Device Package=0603, Supplier Part Number 1=118-CR0603-FX-2200ELFCT-ND, Temperature Coefficient=±100ppm/°C, Tolerance=±1%, ComponentLink1Description=Datasheet, ComponentLink1URL=https://www.bourns.com/docs/Product-Datasheets/CHPREZTR.pdf, ComponentLink2Description="DigiKey Link", ComponentLink2URL=https://www.digikey.com/en/products/detail/bourns-inc/CR0603-FX-2200ELF/3783837, Composition="Thick Film", Features="Moisture Resistant", Height - Seated (Max)="0.022\" (0.55mm)", lastupdated="9/20/2023 7:34:32 PM", Lifecycle Status=Active, Minimum Order=1, Number of Terminations=2, Package / Case="0603 (1608 Metric)", Packaging=CutTape, Part Number=CR0603-FX-2200ELF, Part Status=Active, partid=21101, Price=0.01, Resistance="220 Ohms", Series=CR0603, Size / Dimension="0.063\" L x 0.031\" W (1.60mm x 0.80mm)", Supplier 1=DigiKey
R27: library part ERJ-3EKF4700V, "RES SMD 470 OHM 1% 1/10W 0603", Device Package="0603 (1608 Metric)", Manufacturer="Panasonic Electronic Components", Operating Temperature="-55°C ~ 155°C", Power (Watts)="0.1W, 1/10W", Ratings=AEC-Q200, Supplier Device Package=0603, Supplier Part Number 1=P470HCT-ND, Temperature Coefficient=±100ppm/°C, Tolerance=±1%, ComponentLink1Description=Datasheet, ComponentLink1URL=https://industrial.panasonic.com/cdbs/www-data/pdf/RDA0000/AOA0000C304.pdf, ComponentLink2Description="DigiKey Link", ComponentLink2URL=https://www.digikey.com/en/products/detail/panasonic-electronic-components/ERJ-3EKF4700V/1746417, Composition="Thick Film", Features="Automotive AEC-Q200", Height - Seated (Max)="0.022\" (0.55mm)", lastupdated="2024-02-09 20:43:34", Lifecycle Status=Active, Minimum Order=1, Number of Terminations=2, Package / Case="0603 (1608 Metric)", Packaging=TapeAndReel, Part Number=ERJ-3EKF4700V, Part Status=Active, partid=5664, Price=0.01, Resistance="470 Ohms", Series=ERJ-3EK, Size / Dimension="0.063\" L x 0.031\" W (1.60mm x 0.80mm)", Supplier 1=DigiKey
REV1: library part REV_REVISION_CARTRIDGE_MINI, "REV - REVISION CARTRIDGE MINI", Assembly Type=NONE, Rule="Component Clearance Constraint [Horizontal Clearance = 0mil    Vertical Clearance = 0mil]"
SER1: library part SER_SERIAL_CARTRIDGE_MICRO, "SER - SERIAL CARTRIDGE MICRO", Assembly Type=NONE, Rule="Component Clearance Constraint [Horizontal Clearance = 0mil    Vertical Clearance = 0mil]"
SW1 SW2: library part CMP-05618-000050-1, "SWITCH TACTILE SPST-NO 0.02A 15V", Actuator Color=White, Case/Package=SMD/SMT, Contact Current Rating=20mA, Contact Resistance=100mR, Max Operating Temperature=85°C, Max Voltage Rating (DC)=15V, Min Operating Temperature=-40°C, Operating Force=2.6N, Package Quantity=1, Voltage Rating (AC)=250V, Actuator Length=0.2mm, Actuator Type=Standard, Color=White, Contact Plating=Silver, Current Rating=20mA, Electrical Life=200000Cycles, Illumination Type=Non-Illuminated, Lead Free="Lead Free", Mechanical Life=200000Cycles, Mount="Surface Mount", Orientation=Straight, Packaging="Tape and Reel", Radiation Hardening=No, RoHS Compliant=Yes, Series=EVQQ2, Size=1.8mm, Switch Function=Off-Mom, Switch Travel=0.25mm, Termination=SMD/SMT, Thickness=1.8mm, Throw Configuration=SPST, Voltage Rating (DC)=15V
U1: "Bluetooth, WiFi 802.11b/g/n, Bluetooth v5.0 Transceiver Module 2.4GHz Antenna Not Included, U.FL Surface Mount", Package=None, Availability=Unavailable, Check_prices=https://www.snapeda.com/parts/ESP32-S3-WROOM-1U-N16R8/Espressif+Systems/view-part/?ref=eda, MF="Espressif Systems", MP=ESP32-S3-WROOM-1U-N16R8, Price=None, SnapEDA_Link=https://www.snapeda.com/parts/ESP32-S3-WROOM-1U-N16R8/Espressif+Systems/view-part/?ref=snap
U2 U3 U5 U6: "Low Voltage I2C/SMBus Accelerator", Package="SC70-6 Analog Devices", Check_prices=https://www.snapeda.com/parts/LTC4311ISC6%23TRPBF/Analog+Devices/view-part/?ref=eda, MF="Analog Devices", MP=LTC4311ISC6#TRPBF, SnapEDA_Link=https://www.snapeda.com/parts/LTC4311ISC6%23TRPBF/Analog+Devices/view-part/?ref=snap
U4: library part S-1172B33-E6T1U, "No Description Available", Mfr_Name="Nisshinbo Micro Devices Inc.", Digi-Key_Part_Number_1=R1172S331B-E2-FE, Digi-Key_Part_Number_2=R1172S331B-E2-FE, Digi-Key_Part_Number_3=R1172S331B-E2-FE, RefDes=RefDes, Type=Type

## Via types
v1: diameter 0.5, hole 0.3, Top to Bottom, tented both sides, 147 vias

## Nets (pads, with @x,y where several pads share a name; then routed paths per layer and width w, separated by ;. In a path a pad name is that pad's centre, name@x,y a point inside that pad or via, vN(x,y) a via of type N, cw(c..) or ccw(c..) an arc to the next point about the centre after c; other vN are vias at no path point)
3V3: C2.2 C5.2 C6.2 C7.2 C8.2 C9.2 C10.1 C13.2 C15.2 C17.2 C19.2 D2.1 J2.3 J2.4 J3.3 J3.4 J4.3 J4.4 J5.3 J5.4 J6.1 Q1.2 R7.2 R8.2 R10.1 R11.2 R12.2 R13.2 R14.2 R15.2 R16.2 R23.2 R28.1 U1.2 U2.1 U2.3 U3.1 U3.3 U4.1 U5.1 U5.3 U6.1 U6.3 | length 22.1
  Top w0.3: U4.1 22.957,69.312 25.517,69.312 C10.1
  Bottom w0.152: J2.4 58.431,64.432 C13.2@58.431,61.08 ; J3.4 74.849,65.455 75.441,64.863 C15.2@75.441,61.08 ; J4.4 92.913,65.246 93.325,64.833 C17.2@93.325,61.08 ; C19.2@110.656,60.795 110.764,60.903 J5.4
BOOT_MCU: R28.2 SW2.B U1.27 | length 13.5
  Top w0.152: U1.27 35.066,81.206 36.397,79.874 40.371,79.874 42.247,81.75 SW2.B 43.756,81.458 44.18,81.034 R28.2
Debug: D3.1 U1.35 | length 8
  Top w0.152: U1.35 39.685,92.044 D3.1
EN: C4.1 R9.1 R10.2 U1.3 | length 23
  Top w0.152: R9.1 2.391,93.314 2.341,93.314 1.271,94.384 1.271,97.096 2.57,98.394 6.082,98.394 C4.1 6.246,98.608 6.972,99.334 9.011,99.334 12.491,95.854 R10.2 U1.3
GND: C1.1 C2.1 C3.2 C4.2 C5.1 C6.1 C7.1 C8.1 C9.1 C10.2 C11.1 C12.1 C13.1 C14.1 C15.1 C16.1 C17.1 C18.1 C19.1 D1.2 J1.A1/B12 J1.A12/B1 J2.5 J2.7 J3.5 J3.7 J4.5 J4.7 J5.5 J5.7 J6.10 R1.2 R2.2 R5.2 R6.2 R26.1 R27.1 R29.1 SW1.A SW1.A' SW2.A' U1.1 U1.40 U1.41_1 U1.41_2 U1.41_3 U1.41_4 U1.41_5 U1.41_6 U1.41_7 U1.41_8 U1.41_9 U2.2 U2.5 U3.2 U3.5 U4.2 U4.5 U5.2 U5.5 U6.2 U6.5 | length 29.3
  Top w0.152: R5.2 v1(6.281,73.005) ; J1.A12/B1 6.971,76.259 v1(6.996,76.234) ; J1.A1/B12 6.545,82.643 6.738,82.744 ccw(c6.246,83.679) v1(7.075,83.025) ; C4.2@7.596,98.508 C4.2 ; C4.2@7.874,98.552 v1(8.382,98.552) ; v1@8.545,97.559 v1(8.631,97.559) 8.738,97.452 SW1.A ; SW1.A' 8.738,88.142 9.161,87.718 v1(9.567,87.718) ; R6.2 v1(10.116,54.368) ; R2.2 v1(10.655,75.74) ; v1(10.331,65.637) C3.2 ; R1.2 v1(11.27,84.251) ; C7.1 v1(13.061,88.799) ; v1(12.234,80.372) 12.243,80.364 13.169,80.364 D1.2 ; v1(12.619,74.895) C1.1 ; C6.1 v1(16.023,88.799) ; U1.41_5 U1.41_5@24.91,90.768 ; U1.40 v1(36.322,98.394) ; SW2.A' 40.133,88.927 v1(40.527,88.927) ; R27.1 v1(47.197,94.402) ; R26.1 v1(47.197,97.215) ; v1(62.874,73.363) U2.5 ; U2.2 v1(66.494,73.363) ; v1(67.787,72.277) C2.1 ; v1(80.095,73.363) U3.5 ; U3.2 v1(83.715,73.363) ; v1(84.984,72.05) C5.1 ; v1(97.941,73.265) 97.98,73.303 99.154,73.303 U5.5 ; U5.2 v1(101.739,73.342) ; v1(103.411,72.32) C8.1 ; v1(115.097,73.363) U6.5 U6.5@115.847,73.463 ; U6.2 v1(118.717,73.363) ; v1(120.116,72.299) C9.1 ; v1(120.344,89.068) R29.1
  other v1: 21.009,70.644 25.009,70.644 26.009,70.644 27.009,70.644 28.009,70.644 20.509,71.644 21.509,71.644 24.509,71.644 25.509,71.644 26.509,71.644 27.509,71.644 22.509,93.644 23.509,93.644 22.009,94.644 23.009,94.644 20.509,95.644 21.509,95.644 22.509,95.644 23.509,95.644 20.009,96.644 21.009,96.644 22.009,96.644 23.009,96.644 19.509,97.644 20.509,97.644 21.509,97.644 22.509,97.644 23.509,97.644
NetD2_2: D2.2 R26.2 | length 1.7
  Top w0.152: D2.2 R26.2
NetD3_2: D3.2 R27.2 | length 1.7
  Top w0.152: D3.2 R27.2
NetJ1_1: J1.1 J1.2 J1.3 J1.4 J1.5 J1.6 R5.1 | length 18.7
  Top w0.152: R5.1 4.63,73.354 4.63,74.413 J1.2@5.256,75.039 ; J1.2 J1.2@5.256,75.039 ; J1.1 J1.3 J1.4 J1.5 J1.6 J1.2@5.256,75.039
NetJ1_A5: J1.A5 R1.1 | length 4.5
  Top w0.152: J1.A5 6.18,81.168 6.73,81.168 8.631,83.068 R1.1
NetJ1_A6: J1.A6 J1.B6 R3.1 | length 3.8
  Top w0.152: J1.B6 J1.A6 7.643,79.609 8.831,80.797 R3.1
NetJ1_A7: J1.A7 J1.B7 R4.1 | length 5.7
  Top w0.152: J1.B7 6.062,80.05 5.537,80.05 5.345,79.858 5.345,78.86 5.537,78.668 6.062,78.668 J1.A7 8.458,78.609 8.831,78.982 R4.1
NetJ1_B5: J1.B5 R2.1 | length 3.7
  Top w0.152: J1.B5 6.18,78.05 6.705,78.05 8.159,76.596 8.159,76.064 8.483,75.74 R2.1
NetJ2_6: J2.6 R8.1 R18.1 | length 6.2
  Top w0.152: R8.1 R18.1 56.7,69.213 J2.6
NetJ2_8: J2.8 R7.1 R17.1 | length 9.3
  Top w0.152: R17.1 60.423,71.473 R7.1 60.428,69.646 61.349,68.725 61.349,67.241 60.682,66.574 60.129,66.574 J2.8
NetJ3_6: J3.6 R12.1 R20.1 | length 6.2
  Top w0.152: R12.1 R20.1 74.364,71.444 74.996,70.812 74.996,70.789 75.869,69.916 J3.6
NetJ3_8: J3.8 R11.1 R19.1 | length 9.3
  Top w0.152: R19.1 R11.1 77.789,71.444 79.004,70.229 79.004,67.155 78.337,66.488 77.784,66.488 J3.8
NetJ4_6: J4.6 R14.1 R22.1 | length 6.2
  Top w0.152: R14.1 92.469,71.444 92.506,71.444 92.519,71.457 93.139,70.836 93.139,70.834 93.933,70.041 J4.6
NetJ4_8: J4.8 R13.1 R21.1 | length 9.3
  Top w0.152: R21.1 95.814,71.49 R13.1 95.842,69.775 97.068,68.549 97.068,67.155 96.401,66.488 95.848,66.488 J4.8
NetJ5_6: J5.6 R16.1 R25.1 | length 6.3
  Top w0.152: R16.1 R25.1 110.152,71.49 110.641,71.001 110.641,70.817 111.784,69.674 J5.6
NetJ5_8: J5.8 R15.1 R24.1 | length 9.4
  Top w0.152: R24.1 113.22,71.473 R15.1 113.237,69.981 114.92,68.298 114.92,67.138 114.253,66.472 113.7,66.472 J5.8
NetMTH1_1: MTH1.1 R6.1 | length 5.2
  Top w0.152: MTH1.1@4.064,57.15 6.846,54.368 R6.1
NetMTH2_1: MTH2.1 R29.2 | length 5
  Top w0.152: MTH2.1 119.945,95.055 119.945,91.897 120.294,91.548 R29.2
NetR9_2: R9.2 SW1.B SW1.B' | length 10
  Top w0.152: R9.2 2.471,94.584 3.361,95.474 SW1.B SW1.B' SW1.B'@4.392,88.328
SCL1: R18.2 U1.15 U2.6 | length 50.5
  Top w0.152: U1.15 19.331,80.334 19.875,79.79 19.875,79.77 24.133,75.512 53.882,75.512 56.65,72.744 R18.2 56.75,72.744 57.536,71.957 57.536,71.21 58.487,70.259 v1(59.638,70.259) ; v1(62.86,72.129) 62.86,72.245 63.329,72.713 U2.6
  Bottom w0.152: v1(59.638,70.259) 61.106,70.259 62.86,72.013 v1(62.86,72.129)
SCL2: R20.2 U1.17 U3.6 | length 65.1
  Top w0.152: U1.17 21.871,80.334 22.415,79.79 22.415,79.77 26.114,76.07 70.938,76.07 74.264,72.744 R20.2 74.364,72.744 75.275,71.833 75.275,70.905 75.689,70.491 v1(77.922,70.491) ; v1(79.676,72.498) 79.891,72.713 U3.6 U3.6@80.908,72.677
  Bottom w0.152: v1(77.922,70.491) 79.676,72.245 v1(79.676,72.498)
SCL3: R22.2 U1.19 U5.6 | length 80.8
  Top w0.152: U1.19 24.785,80.26 24.785,79.94 28.096,76.629 72.115,76.629 72.117,76.627 88.185,76.627 91.566,73.246 91.566,72.956 91.765,72.757 R22.2 92.519,72.757 93.419,71.857 93.419,70.95 93.916,70.452 v1(94.773,70.452) ; v1(98.343,72.591) 98.394,72.641 99.142,72.641 U5.6
  Bottom w0.152: v1(94.773,70.452) 96.254,70.452 98.343,72.541 v1(98.343,72.591)
SCL4: R25.2 U1.21 U6.6 | length 95
  Top w0.152: U1.21 26.951,80.334 27.495,79.79 27.495,79.77 30.077,77.188 105.654,77.188 110.052,72.79 R25.2 110.152,72.79 110.921,72.021 110.921,70.933 111.209,70.645 v1(112.102,70.645) ; v1(115.083,72.013) 115.15,72.08 115.15,72.311 115.552,72.713 U6.6
  Bottom w0.152: v1(112.102,70.645) 112.169,70.712 113.782,70.712 v1(115.083,72.013)
SD_CS: J7.4 U1.31 | length 24.7
  Top w0.152: U1.31 35.138,86.892 v1(36.308,86.892)
  Bottom w0.152: v1(36.308,86.892) 36.402,86.892 36.618,86.677 36.756,86.677 36.864,86.569 36.864,77.193 44.813,69.244 J7.4
SD_MISO: J7.3 U1.30 | length 22.4
  Top w0.152: U1.30 35.11,85.65 v1(36.283,85.65)
  Bottom w0.152: v1(36.283,85.65) 36.283,81.56 36.066,81.343 36.066,77.347 42.313,71.1 J7.3
SD_MOSI: J7.2 U1.26 | length 16.3
  Top w0.152: U1.26 33.398,80.537 v1(33.398,79.411)
  Bottom w0.152: v1(33.398,79.411) 36.474,76.335 36.683,76.335 39.813,73.205 J7.2
SD_SCK: J7.1 U1.25 | length 16.1
  Top w0.152: U1.25 32.033,80.632 v1(32.033,79.372)
  Bottom w0.152: v1(32.033,79.372) 32.616,79.372 34.703,77.285 34.708,77.285 37.313,74.68 J7.1
SDA1: R17.2 U1.16 U2.4 | length 47.2
  Top w0.152: U1.16 20.975,80.26 20.975,79.94 25.124,75.791 55.496,75.791 58.514,72.773 R17.2 59.267,72.773 59.553,73.059 59.553,73.194 60.373,74.013 U2.4
SDA2: R19.2 U1.18 U3.4 | length 62
  Top w0.152: U1.18 23.515,80.26 23.515,79.94 27.105,76.35 71.999,76.35 75.113,73.235 75.113,72.954 75.323,72.744 R19.2 76.077,72.744 77.346,74.013 U3.4
SDA3: R21.2 U1.20 U5.4 | length 77.8
  Top w0.152: U1.20 25.681,80.334 26.225,79.79 26.225,79.77 29.086,76.909 90.192,76.909 90.751,76.35 91.231,76.35 94.17,73.411 R21.2 94.22,72.79 95.422,73.992 U5.4
SDA4: R24.2 U1.22 U6.4 | length 91.7
  Top w0.152: U1.22 28.221,80.334 28.765,79.79 28.765,79.77 31.065,77.47 106.924,77.47 111.622,72.773 R24.2 111.722,72.773 112.962,74.013 U6.4
TFT&TOUCH_MISO: J6.8 U1.8 | length 46.3
  Top w0.152: U1.8 18.399,89.504 19.299,88.605 19.299,83.369 v1(18.733,82.804)
  Bottom w0.152: v1(18.733,82.804) 18.729,82.8 18.729,70.792 23.042,66.479 23.042,56.199 23.902,55.34 29.863,55.34 30.9,56.376 31.865,56.376 J6.8@32.004,56.515
TFT&TOUCH_MOSI: J6.5 U1.4 | length 41.6
  Top w0.152: U1.4 18.399,94.584 19.578,93.405 19.578,83.254 19.431,83.107 v1(19.431,82.296)
  Bottom w0.152: v1(19.431,82.296) 19.431,79.677 19.313,79.559 19.313,70.603 24.382,65.534 J6.5
TFT&TOUCH_SCK: J6.6 U1.24 | length 27.1
  Top w0.152: U1.24 30.761,79.726 v1(32.293,78.194)
  Bottom w0.152: J6.6 26.882,61.923 32.293,67.334 v1(32.293,78.194) 32.293,78.197 v1@32.258,78.232
TFT_BL: Q1.1 R23.1 U1.10 | length 32.7
  Top w0.152: U1.10 17.866,86.964 18.41,86.42 18.43,86.42 18.592,86.259 18.592,84.922 18.718,84.795 v1(18.718,84.701) ; v1(30.353,68.199) 30.353,63.01 Q1.1 30.471,63.019 R23.1
  Bottom w0.152: v1(18.718,84.701) 21.293,84.701 30.407,75.587 30.407,68.253 v1(30.353,68.199)
TFT_CS: J6.2 U1.11 | length 33.8
  Top w0.152: v1(13.649,84.519) 14.824,85.694 U1.11
  Bottom w0.152: v1(13.649,84.519) 13.649,66.002 16.882,62.769 J6.2
TFT_DC: J6.4 U1.23 | length 40.6
  Top w0.152: U1.23 29.491,79.617 30.058,79.617 v1(30.185,79.49)
  Bottom w0.152: J6.4 23.518,54.864 33.058,54.864 33.147,54.953 33.147,78.446 32.815,78.779 30.896,78.779 v1(30.185,79.49)
TFT_LED: J6.7 Q1.3 | length 4.5
  Top w0.152: J6.7 29.382,60.88 Q1.3
TFT_RST: J6.3 U1.29 | length 48.9
  Top w0.152: v1(32.369,85.967) 33.912,84.424 U1.29
  Bottom w0.152: J6.3 18.323,57.559 18.323,63.996 16.342,65.977 16.342,83.909 18.399,85.967 v1(32.369,85.967)
TOUCH_CS: J6.9 U1.9 | length 44.8
  Top w0.152: v1@15.113,73.406 15.072,73.365 15.072,70.496 23.339,62.229 29.424,62.229 32.047,59.606 32.047,58.835 J6.9 ; v1(16.436,87.872) 16.799,88.234 U1.9
  Bottom w0.152: v1(15.072,73.445) 15.072,86.507 v1(16.436,87.872)
Usb1_N: D1.3 R4.2 | length 3.4
  Top w0.152: R4.2 11.941,79.032 12.539,79.63 12.583,79.63 12.734,79.781 13.104,79.781 D1.3
Usb1_P: D1.1 R3.2 | length 3.1
  Top w0.152: R3.2 10.139,80.855 11.576,80.855 11.673,80.952 12.475,80.952 12.498,80.929 12.759,80.929 12.833,80.855 D1.1
UsbData_N: D1.4 U1.13 | length 6.7
  Top w0.152: D1.4 14.714,79.929 14.178,79.929 14.017,80.091 14.017,81.119 14.202,81.305 16.046,81.305 16.54,81.798 16.54,82.449 16.702,82.61 16.803,82.61 16.892,82.7 16.892,82.78 17.266,83.154 U1.13
UsbData_P: D1.6 U1.14 | length 3.2
  Top w0.152: D1.6 16.237,80.855 17.266,81.884 U1.14
VCC: C1.2 C3.1 C11.2 C12.2 C14.2 C16.2 C18.2 D1.5 J1.A4/B9 J1.B4/A9 J2.1 J2.2 J3.1 J3.2 J4.1 J4.2 J5.1 J5.2 U4.3 U4.6 | length 29.4
  Top w0.5: 16.042,70.425 17.088,69.378 U4.6 ; J3.2 71.809,66.603 J3.1 ; J4.2 89.873,66.603 J4.1 ; J5.2 107.724,66.586 J5.1
  Bottom w0.152: J2.2 54.211,64.591 C12.2@54.211,61.08 ; J3.2 71.494,64.878 C14.2@71.494,61.08 ; J4.2 90.077,64.359 C16.2@90.077,61.08 ; J5.2 107.557,64.714 C18.2@107.557,60.697
  other v1: 50.81,64.645 51.61,64.645 52.41,64.645 49.61,65.445 50.41,65.445 51.21,65.445 49.21,66.245 50.01,66.245 50.81,66.245 51.61,66.245 48.01,67.045 48.81,67.045 49.61,67.045 50.41,67.045 51.21,67.045 52.01,67.045 52.81,67.045 47.61,67.845 48.41,67.845 49.21,67.845 50.01,67.845 50.81,67.845 51.61,67.845 52.41,67.845 48.01,68.645 48.81,68.645 49.61,68.645 50.41,68.645 51.21,68.645 52.01,68.645 52.81,68.645 47.61,69.445 48.41,69.445 49.21,69.445 50.01,69.445 50.81,69.445 51.61,69.445 52.41,69.445 53.21,69.445 54.01,69.445 54.81,69.445 48.01,70.245 48.81,70.245 49.61,70.245 50.41,70.245 51.21,70.245 52.01,70.245 52.81,70.245 47.61,71.045 48.41,71.045 49.21,71.045 50.01,71.045 50.81,71.045 51.61,71.045 48.01,71.845 48.81,71.845 49.61,71.845 50.41,71.845 51.21,71.845 47.61,72.645 48.41,72.645 49.21,72.645 50.01,72.645 48.01,73.445 48.81,73.445 49.61,73.445
pads on no net: J1. J1.A8 J1.B8 J2. J3. J4. J5. SW2.A SW2.B' U1.5 U1.6 U1.7 U1.12 U1.28 U1.32 U1.33 U1.34 U1.36 U1.37 U1.38 U1.39 U1.41_10 U1.41_11 U1.41_12 U1.41_13 U1.41_14 U1.41_15 U1.41_16 U1.41_17 U1.41_18 U1.41_19 U1.41_20 U1.41_21 U4.4

## Polygon pours and split planes (outlines as drawn)
VCC on Bottom "NONET_L-01_P-001" (solid, pour order 4): 47.077,74.202 47.473,63.431 108.212,63.569 108.212,64.917 108.861,65.566 108.861,68.961 106.946,68.961 106.357,68.371 106.357,67.05 91.094,67.05 91.094,68.814 88.953,68.814 88.731,68.592 88.731,66.91 73.101,66.913 73.101,66.753 72.988,67.05 72.988,68.814 70.677,68.814 70.677,66.916 55.333,66.916 55.333,74.367
GND on Bottom "NONET_L-01_P-001" (solid, pour order 5): 0,57.705 0,95 cw(c5,95) 5,100 118.571,100 cw(c118.571,95) 123.571,95 123.571,57.705 cw(c118.571,57.705) 118.571,52.705 5,52.705 cw(c5,57.705)
VCC on Bottom "VCC_L02_P006" (solid, pour order 6): 70.46,66.587 70.677,66.804 70.677,68.814 72.311,68.814 72.946,68.178 72.946,66.535
GND on Top "NONET_L-01_P-001" (solid, pour order 1): 24.116,93.059 23.768,93.407 23.768,98.208 19.771,98.208 18.946,99.033 16.356,99.033 16.356,98.15 16.867,97.639 18.629,97.639 19.578,96.045 22.564,93.059 22.498,92.994 22.498,88.525 27.21,88.525 27.21,93.059
3V3 on Top "NONET_L-01_P-001" (solid, remove dead copper, pour order 8): 0,57.705 0,95 cw(c5,95) 5,100 118.571,100 cw(c118.571,95) 123.571,95 123.571,57.705 cw(c118.571,57.705) 118.571,52.705 5,52.705 cw(c5,57.705)
VCC on Top "NONET_L-01_P-001" (solid, pour order 2): 22.957,72.417 42.058,72.417 50.16,64.315 53.619,64.315 54.668,66.342 55.503,67.176 55.503,70.009 53.735,70.009 48.829,74.915 22.957,74.915